# Altium PCB Board3_Layout.PcbDoc
Units mil, origin at the board's own origin, x right, y up, seen from the top; angles counter-clockwise.
Board outline 3200 x 3100 mil, 2 copper layers (Top Layer, Bottom Layer); 52 components, 45 nets, 229 pads, 51 vias.
Unrouted connection lines stored in the file: 1.
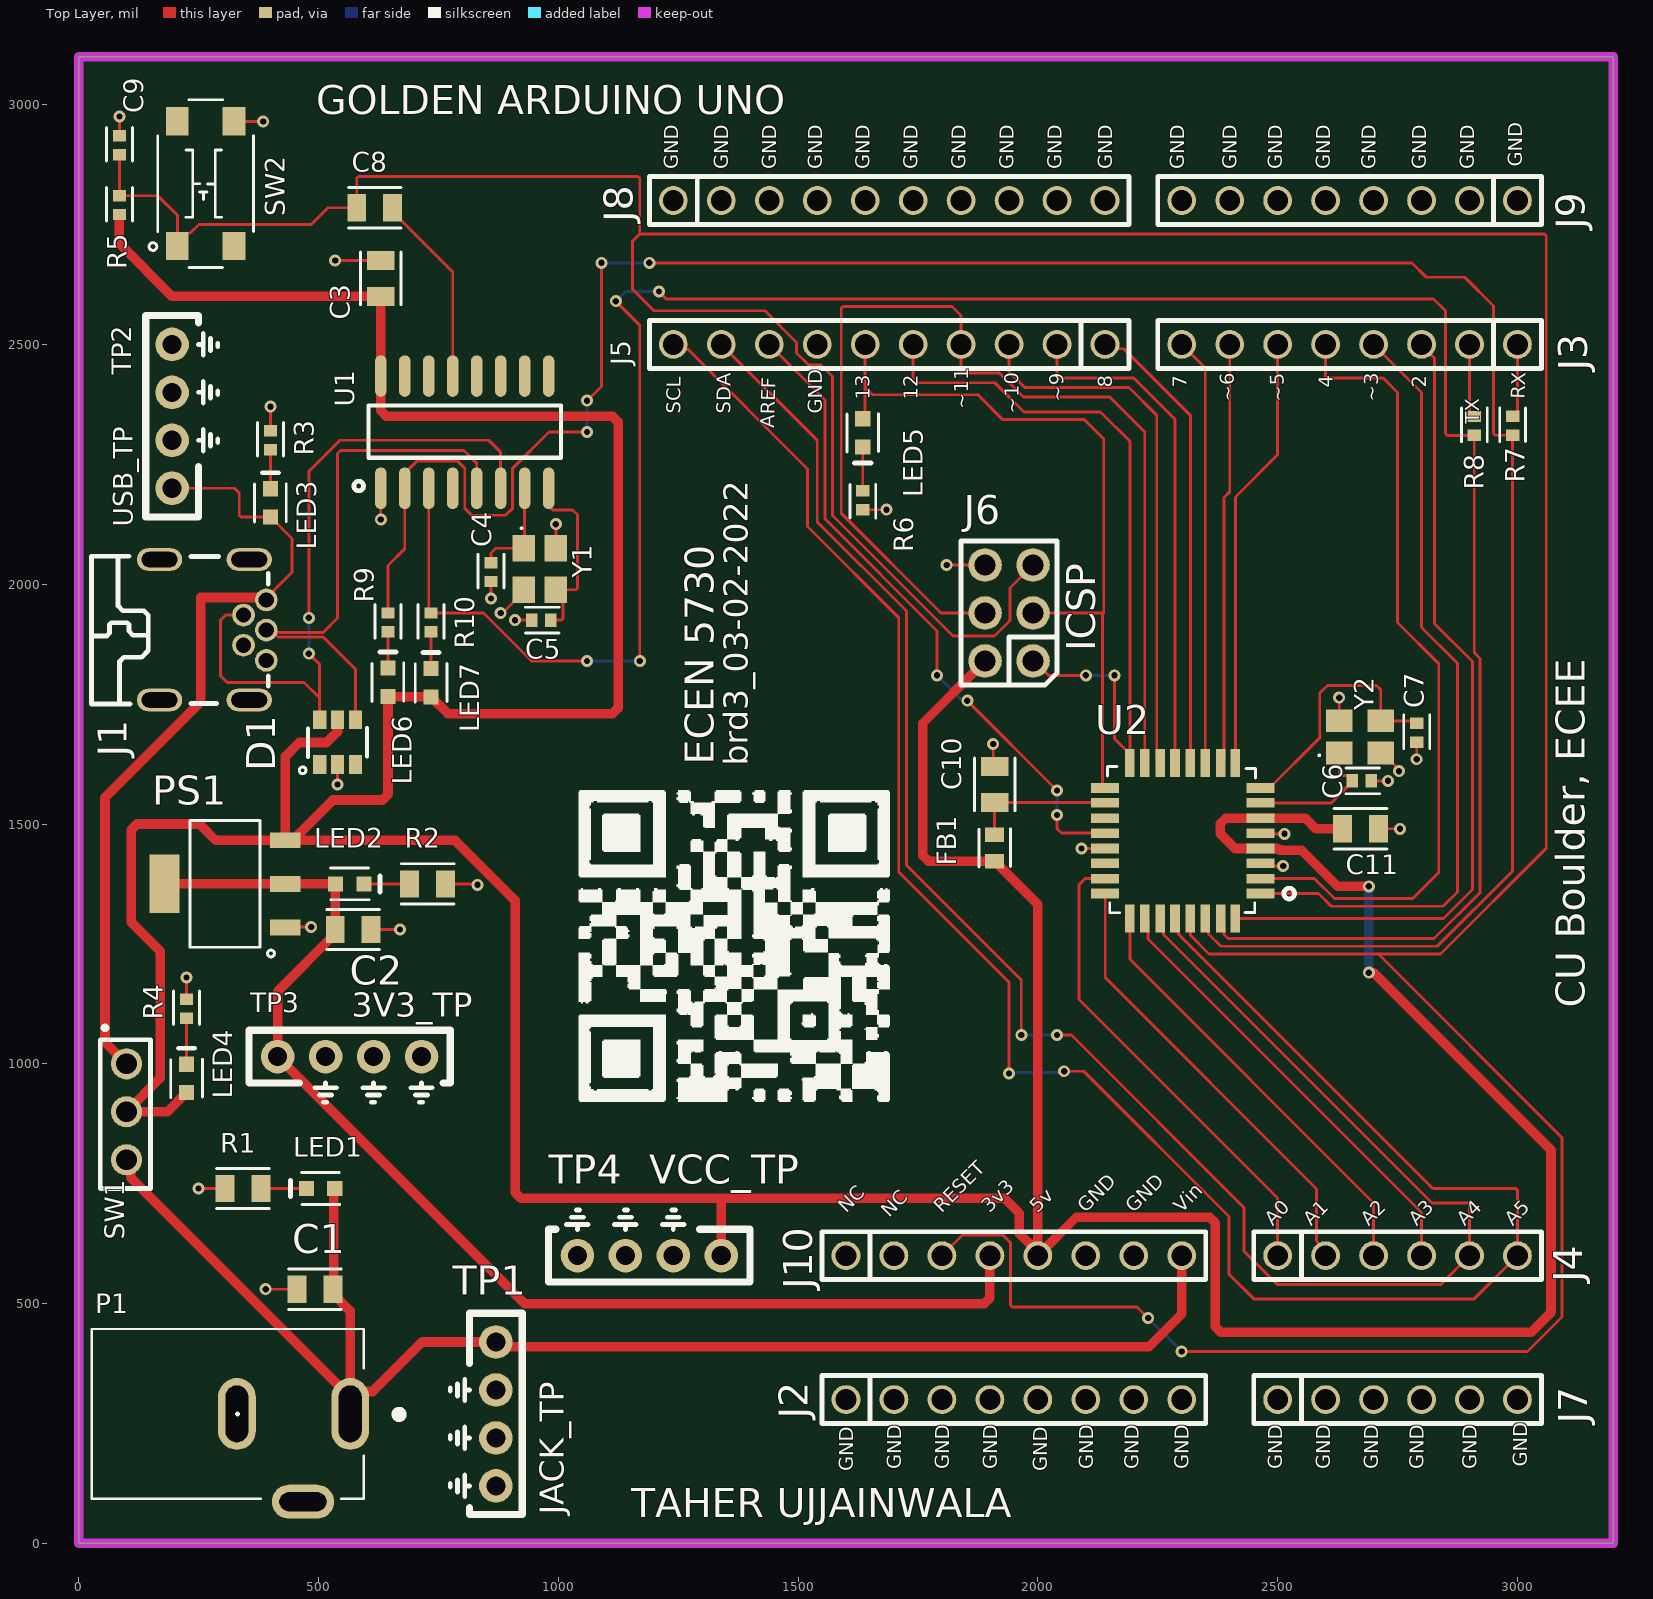
[diagram p0: Top Layer view]
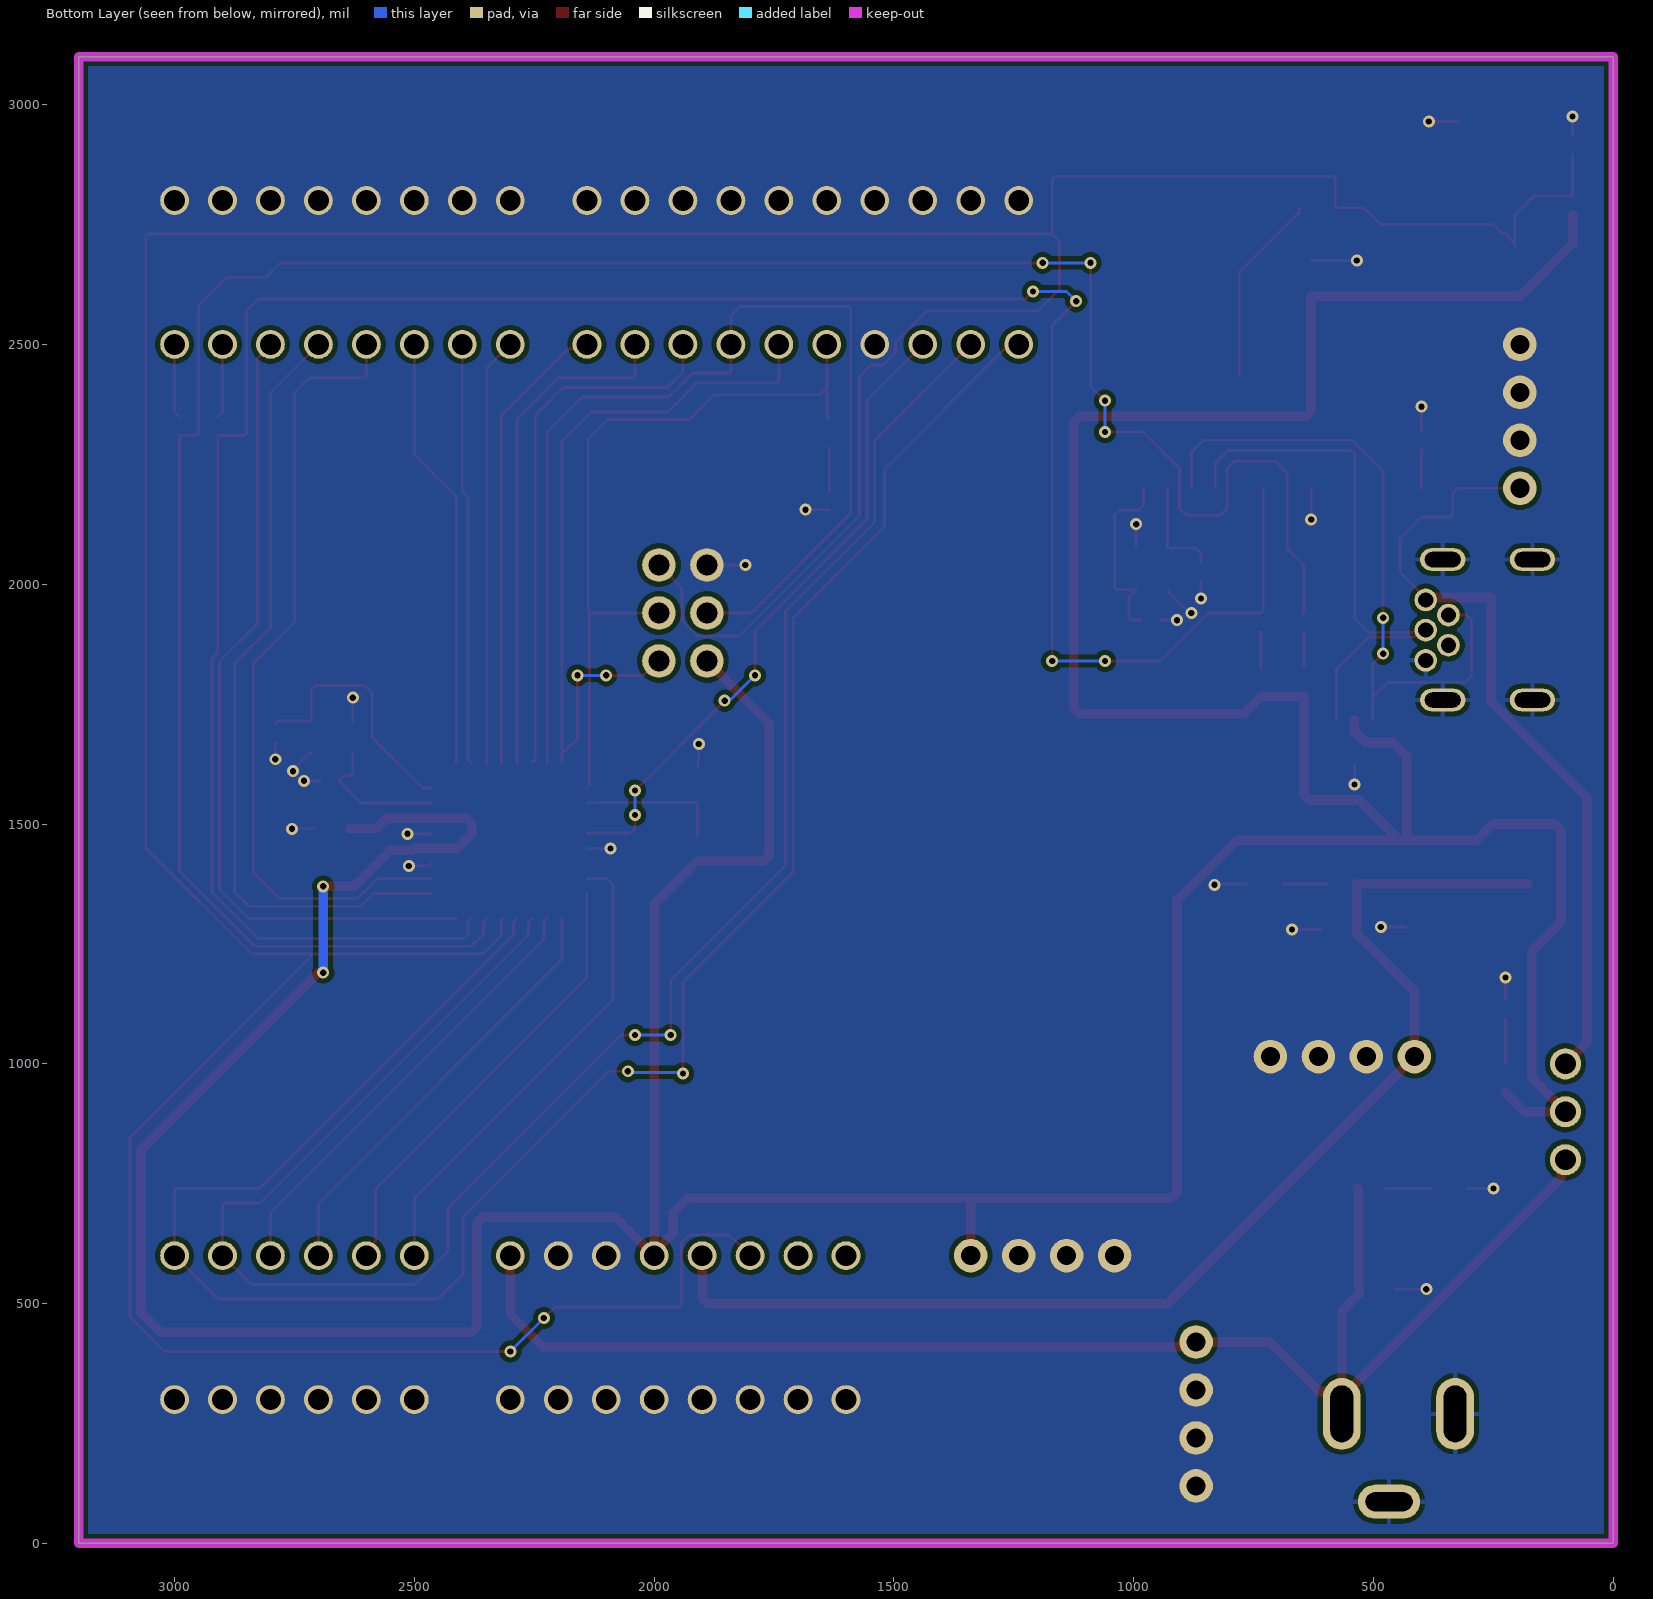
[diagram p1: Bottom Layer view, seen from below]
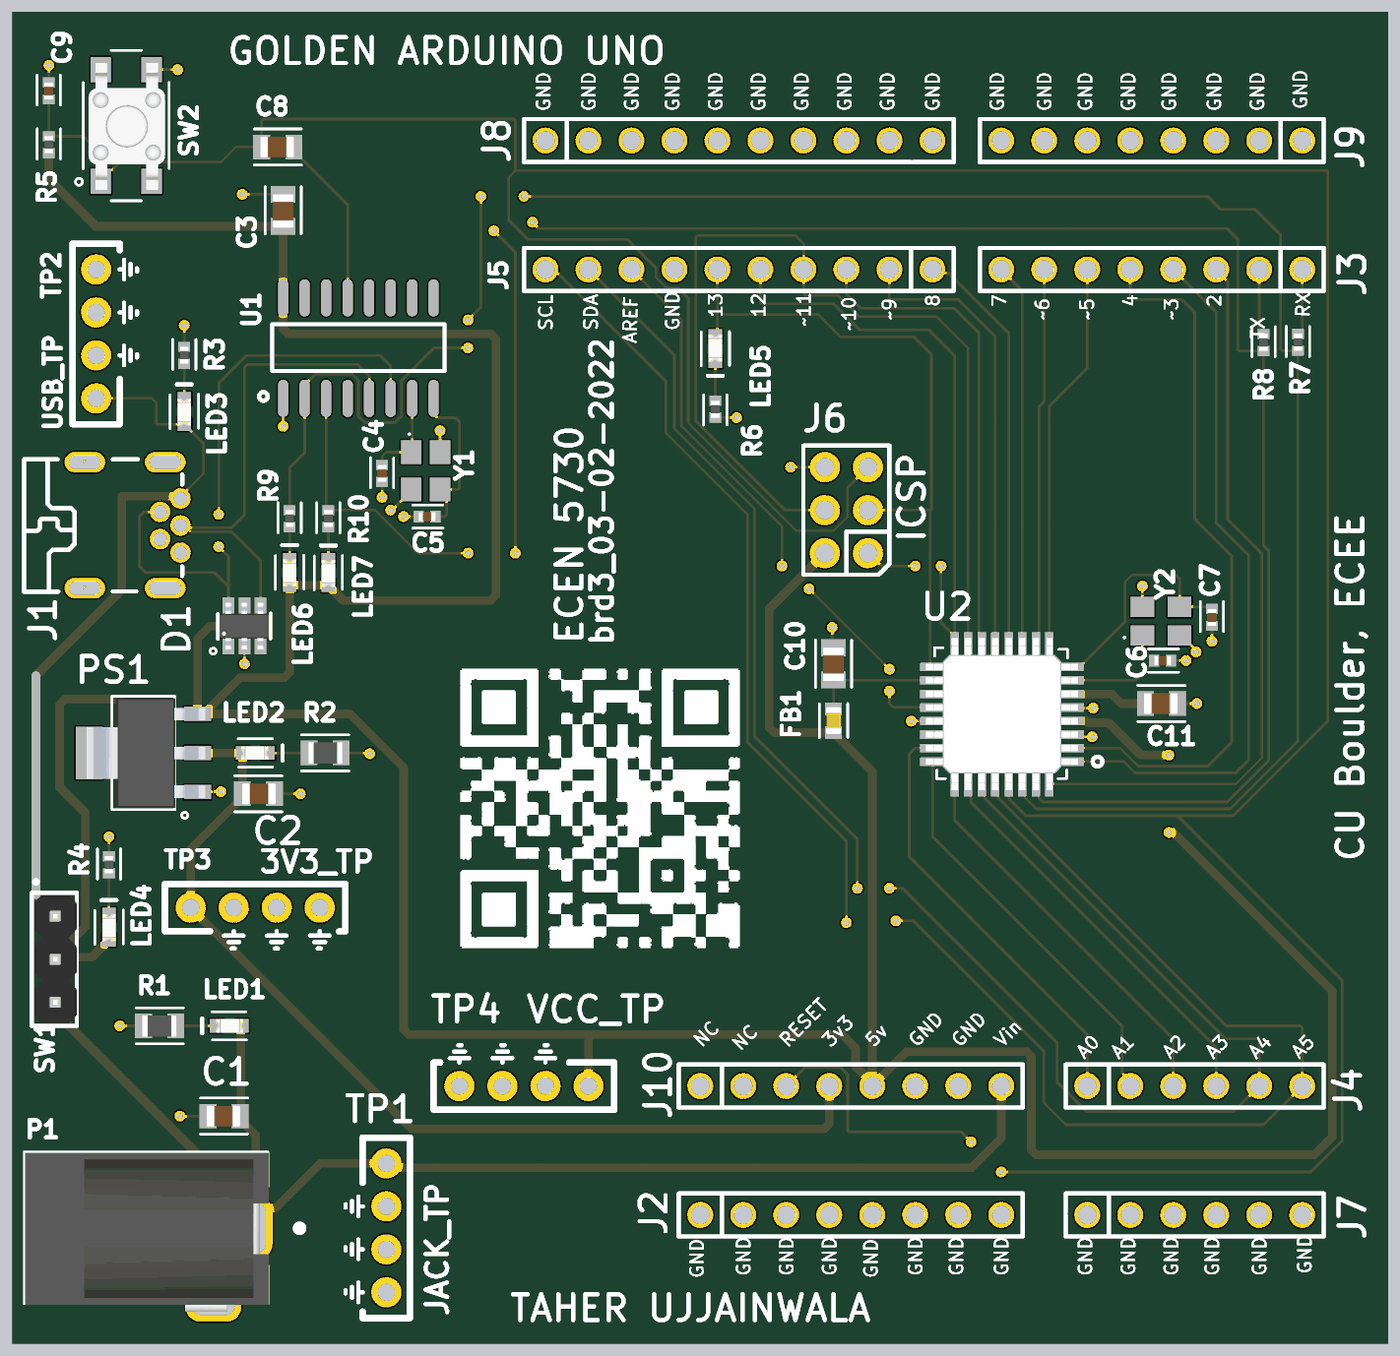
[diagram p2: 3D render of the assembled board from above, using the file's embedded part models]

## Layer stack, top to bottom
Top Solder: solder mask 0.4, Solder Resist, Dk 3.5
Top Layer: signal copper 1.4
Dielectric 1: dielectric 12.6, FR-4, Dk 4.8
Bottom Layer: signal copper 1.4
Bottom Solder: solder mask 0.4, Solder Resist, Dk 3.5

## Board outline
0,0 3200,0 3200,3100 0,3100

## Design rules (kind name [scope] priority, off if disabled: settings)
Clearance [All] p1: gap=10 ignorepadtopadclearanceinfootprint=FALSE except(0: Arc-Hole Track-Hole SMDPad-Hole THPad-Hole Via-Hole Fill-Hole Poly-Hole Region-Hole Text-Hole)
MinimumSolderMaskSliver [All] p1: minsoldermaskwidth=6
PlaneClearance [All] p1: clearance=10
PlaneConnect [All] p1: planeconnectstyle=Direct reliefexpansion=20 reliefentries=4 reliefconductorwidth=10 reliefairgap=10
PolygonConnect [All] p1: connectstyle=Direct reliefconductorwidth=10 reliefentries=4 polygonreliefangle="90 Angle" airgapwidth=10
RoutingVias [All] p1: holewidth=13 width=25 viastyle="Through Hole" minholewidth=13 minwidth=25 maxholewidth=60 maxwidth=80
SolderMaskExpansion [All] p1: expansion=4 istentingtop=FALSE
UnRoutedNet [All] p1: checkbadconnections=TRUE
Width "Schematic Width Constraint_2" [InNet('VCC_5V')] p1: maxlimit=20 minlimit=10 preferedwidth=20 minimp=50.000000 maximp=50.000000 favimp=50.000000
Width "Schematic Width Constraint_1" [InNet('JACK_5V')] p2: maxlimit=100 minlimit=10 preferedwidth=20 minimp=50.000000 maximp=50.000000 favimp=50.000000
Width "Schematic Width Constraint" [InNet('3V3')] p3: maxlimit=20 minlimit=10 preferedwidth=20 minimp=50.000000 maximp=50.000000 favimp=50.000000
Width [InNet('USB_5V')] p4: maxlimit=20 minlimit=10 preferedwidth=20 minimp=50.000000 maximp=50.000000 favimp=50.000000
26 further rules are at their usual default settings.

## Components (designator, comment, footprint, x,y, rotation, side; value= is the part's Value field where it differs from the comment)
C1 "22uF" 0805_Passive_Capaciitor 492.6,530 r0 top
C2 "22uF" 0805_Passive_Capaciitor 572.4,1280 r180 top
C3 "22uF" 0805_Passive_Capaciitor 630,2637.6 r90 top
C4 "22pF" 0402_Passive_Capacitor 860,2025.31 r90 top
C5 "22pF" 0402_Passive_Capacitor 964.68,1925 r0 top
C6 "22pF" 0402_Passive_Capacitor 2675.31,1590 r0 top
C7 "22pF" 0402_Passive_Capacitor 2790,1690.31 r90 top
C8 "22uF" 0805_Passive_Capaciitor 617.4,2785 r0 top
C9 "1uF" 0402_Passive_Capacitor 85,2915.31 r90 top
C10 "22uF" 0805_Passive_Capaciitor 1910,1582.6 r90 top
C11 "22uF" 0805_Passive_Capaciitor 2672.6,1490 r0 top
D1 "SRV05-4-P-T7" TVS 540,1670 r90 top value="TVS DIODE 5.5V 6TSOP"
FB1 "FB_10uH_0603" 0603_PASSIVE_Capacitor 1910,1450 r90 top
J1 "USB Mini" USB_MINI_B 280,1905 r270 top value="USB mini B"
J2 "PPTC081LFBN-RC" 8_PIN_ARDUINO_100MIL 1600,300 r0 top locked value=Female
J3 "PPTC081LFBN-RC" 8_PIN_ARDUINO_100MIL 3000,2500 r180 top locked value=Female
J4 "PPTC061LFBN-RC" 6_PIN_ARDUINO_100mil 2500,600 r0 top locked value=Female
J5 "PPTC101LFBN-RC" 10_PIN_ARDUINO_100MIL 2140,2500 r180 top locked value=Female
J6 "NRPN032PAEN-RC" ICSP 1990,1840 r180 top
J7 "PPTC061LFBN-RC" 6_PIN_ARDUINO_100mil 2500,300 r0 top locked value=Female
J8 "PPTC101LFBN-RC" 10_PIN_ARDUINO_100MIL 1240,2800 r0 top locked value=Female
J9 "PPTC081LFBN-RC" 8_PIN_ARDUINO_100MIL 3000,2800 r180 top locked value=Female
J10 "PPTC081LFBN-RC" 8_PIN_ARDUINO_100MIL 1600,600 r0 top locked value=Female
LED1 "KT-0603R" LED_0603 504.53,740 r180 top value=Red
LED2 "KT-0603R" LED_0603 565.47,1375 r0 top value=Green
LED3 "KT-0603R" LED_0603 400,2169.53 r90 top value=Red
LED4 "KT-0603R" LED_0603 225,969.53 r90 top value=Red
LED5 "KT-0603R" LED_0603 1635,2315.47 r270 top value=Red
LED6 "KT-0603R" LED_0603 645,1795.47 r90 top value=Red
LED7 "KT-0603R" LED_0603 735,1794.53 r90 top value=Red
P1 "Power Jack" Power_Jack 566.22,270 r180 top value="CONN PWR JACK 2X5.5MM SOLDER"
PS1 "AMS1117-3.3" LDO 305,1375 r90 top value="IC REG LINEAR 3.3V 800MA SOT223"
R1 "1k" 0805_Passive_Resistor 342.6,740 r180 top value="1K Ohm"
R2 "1k" 0805_Passive_Resistor 727.6,1375 r0 top value="1K Ohm"
R3 "1k" 0402_Passive_Resistor 400,2300.31 r90 top value="1K Ohm"
R4 "1k" 0402_Passive_Resistor 225,1114.68 r90 top value="1K Ohm"
R5 "10k" 0402_Passive_Resistor 85,2790.31 r90 top value=10KOhm
R6 "1k" 0402_Passive_Resistor 1635,2175 r270 top value="1K Ohm"
R7 "1k" 0402_Passive_Resistor 2990,2330.31 r90 top value="1K Ohm"
R8 "1k" 0402_Passive_Resistor 2910,2330 r90 top value="1K Ohm"
R9 "1k" 0402_Passive_Resistor 645,1920.31 r90 top value="1K Ohm"
R10 "1k" 0402_Passive_Resistor 735,1920.31 r90 top value="1K Ohm"
SW1 "PREC003SAAN-RC" 3_PIN_100mil 100,1000 r270 top value="CONN HEADER VERT 3POS 2.54MM"
SW2 "TL3305AF160QG" Switch_JLC 265,2835 r90 top
TP1 "TP_5V" TP10x_Probe 870,270 r270 top
TP2 "10x Probe TP" TP10x_Probe 195,2350 r90 top
TP3 "10x Probe TP" TP10x_Probe 565,1015 r0 top
TP4 "10x Probe TP" TP10x_Probe 1190,600 r180 top
U1 "CH340G" "USB to serial" 805,2317 r0 top value="USB to Serial"
U2 "ATMEGA328P-ANR" ATMega328P 2300,1465 r0 top value="IC MCU 8BIT 32KB FLASH 32TQFP"
Y1 "X322512MSB4SI" "Crystal resonator" 963.5,2031.7 r270 top value=12MHz
Y2 "X322516MLB4SI" "Crystal resonator" 2671.68,1683.5 r0 top value=16MHz

## Footprints (in the part's own frame and the unit in brackets; to place one, negate y for a bottom-side part, rotate by r counter-clockwise, add the part's x,y. Pads: shape width x height; smd on the part's side, far side on the other; paste and mask are expansions set on the pad)
3_PIN_100mil [mm]
  round 1.65 hole 1.1: 1(0,0) 2(2.54,0) 3(5.08,0)
  silkscreen extent -2,-1.4 6.6,1.27, body extent -1.14,-1.27 6.48,1.27, height 8.38
6_PIN_ARDUINO_100mil [mil]
  round 60 hole 43.31: 1(0,0) 2(100,0) 3(200,0) 4(300,0) 5(400,0) 6(500,0)
  silkscreen extent -50,-50 550,50
8_PIN_ARDUINO_100MIL [mil]
  round 60 hole 43.31: 1(0,0) 2(100,0) 3(200,0) 4(300,0) 5(400,0) 6(500,0) 7(600,0) 8(700,0)
  silkscreen extent -50,-50 750,50
10_PIN_ARDUINO_100MIL [mil]
  round 60 hole 43.31: 1(0,0) 2(100,0) 3(200,0) 4(300,0) 5(400,0) 6(500,0) 7(600,0) 8(700,0) 9(800,0) 10(900,0)
  silkscreen extent -50,-50 950,50
0402_Passive_Capacitor [mm] "Reference: https://www.worthingtonassembly.com/perfect-0402-footprint"
  rect 0.6x0.7 smd mask+0: 1(-0.5,0) 2(0.5,0)
  silkscreen extent -0.84,-0.69 0.94,0.69, body extent -0.5,-0.27 0.5,0.28, height 0.5
0402_Passive_Resistor [mm] "Reference: https://www.worthingtonassembly.com/perfect-0402-footprint"
  rect 0.6x0.7 smd mask+0: 1(-0.5,0) 2(0.5,0)
  silkscreen extent -0.84,-0.69 0.94,0.69, body extent -0.49,-0.25 0.51,0.25, height 0.4
0603_PASSIVE_Capacitor [mm] "Reference: http://livepartlibrary.com/fpdimensions.html"
  rect 0.75x1 smd mask+0: 1(-0.7,0) 2(0.7,0)
  silkscreen extent -1.02,-0.84 1.02,0.84, body extent -0.79,-0.45 0.81,0.45, height 0.79
0805_Passive_Capaciitor [mm] "Reference: http://livepartlibrary.com/fpdimensions.html"
  rect 1x1.45 smd mask+0: 1(-0.95,0) 2(0.95,0)
  silkscreen extent -1.4,-1.07 1.4,1.07, body extent -1.04,-0.62 0.96,0.63, height 1.4
0805_Passive_Resistor [mm] "Reference: http://livepartlibrary.com/fpdimensions.html"
  rect 1x1.45 smd mask+0: 1(-0.95,0) 2(0.95,0)
  silkscreen extent -1.4,-1.07 1.4,1.07, body extent -0.98,-0.62 1.02,0.63, height 0.5
ATMega328P [mil]
  rect 58x20 smd mask+1: 1(163.93,-110) 2(163.93,-79) 3(163.93,-47) 4(163.93,-16) 5(163.93,16) 6(163.93,47) 7(163.93,79) 8(163.93,110) 17(-160.07,110) 18(-160.07,79) 19(-160.07,47) 20(-160.07,16) 21(-160.07,-16) 22(-160.07,-47) 23(-160.07,-79) 24(-160.07,-110)
  rect 20x58 smd mask+1: 9(111.93,162) 10(80.93,162) 11(48.93,162) 12(17.93,162) 13(-14.07,162) 14(-45.07,162) 15(-77.07,162) 16(-108.07,162) 25(-108.07,-162) 26(-77.07,-162) 27(-45.07,-162) 28(-14.07,-162) 29(17.93,-162) 30(48.93,-162) 31(80.93,-162) 32(111.93,-162)
  silkscreen extent -155,-150 235,155, body extent -175,-177 179,177, height 46
"Crystal resonator" [mil]
  rect 55.11x47.24 smd: 1(-43.3,-35.43) 2(43.31,-35.43) 3(43.32,31.5) 4(-43.3,31.5)
  silkscreen extent -87,-42 -83,-38, body extent -65,-47 65,47, height 31
ICSP [mil]
  round 70 hole 43.31: 1(0,0) 2(0,-100) 3(0,-200) 4(100,0) 5(100,-100) 6(100,-200)
  silkscreen extent -50,-250 150,50
LDO [mil]
  rect 33x63 smd: 1(-91,-126) 2(0,-126) 3(91,-126)
  rect 122x63 smd: 4(0,126)
  silkscreen extent -152,-103 132,73, body extent -128,-144 128,132, height 73
LED_0603 [mm]
  rect 0.8x0.8 smd: 1(-0.75,0) 2(0.75,0)
  silkscreen extent -1.02,-0.84 1.6,0.84, body extent -0.84,-0.41 0.76,0.39, height 0.55
Power_Jack [mm]
  oval 2x3.8 hole 1.2 slot 3 at 90 deg: 1(0,0) 2(6,0)
  oval 3.3x1.8 hole 1 slot 2.5 at 0 deg: 3(2.5,4.65)
  silkscreen extent -2.79,-4.5 13.68,4.5, body extent -0.76,-4.45 13.64,4.95, height 11.49
Switch_JLC [mm]
  rect 1.5x1.2 smd: 1(-3.3,1.5) 2(3.3,1.5) 3(-3.3,-1.5) 4(3.3,-1.5)
  silkscreen extent -4.44,-2.54 4.45,3, body extent -3.8,-2.29 3.7,2.21, height 3.7
TP10x_Probe [mil] "Small Probs footprint"
  round 70 hole 40: 1(-150,0) 2(-50,0) 2(50,0) 2(150,0)
  silkscreen extent -210,-95 210,55
TVS [mm]
  rect 1x0.7 smd mask+0.025: 1(-1.162,0.95) 2(-1.162,0) 3(-1.162,-0.95) 4(1.2,-0.95) 5(1.2,0) 6(1.2,0.95)
  silkscreen extent -1.65,-1.55 0.76,2.03, body extent -1.37,-1.44 1.38,1.46, height 1.1
"USB to serial" [mil]
  oval 24x86.61 smd: 1(-175,-117) 2(-125,-117) 3(-75,-117) 4(-25,-117) 5(25,-117) 6(75,-117) 7(125,-117) 8(175,-117) 9(175,117) 10(125,117) 11(75,117) 12(25,117) 13(-25,117) 14(-75,117) 15(-125,117) 16(-175,117)
  silkscreen extent -231,-122 201,56
USB_MINI_B [mm]
  round 1.2 hole 0.8: 1(-1.58,2.826) 2(-0.78,1.622) 3(0.02,2.826) 4(0.82,1.622) 5(1.62,2.826)
  oval 1.2x2.4 hole 0.8 slot 1.9 at 90 deg: 6(-3.72,1.924) 7(3.72,1.924) 8(-3.72,-2.826) 9(3.72,-2.826)
  silkscreen extent -3.89,-6.42 3.93,2.93

## Part data
C1 C2 C3 C8 C10 C11: library part C_22uF_0805, "MULTILAYER CERAMIC CAPACITORS MLCC - SMD/SMT 22UF 25V 0805 ROHS", LCSC Part#=C45783, MFR Part #=CL21A226MAQNNNE, Datasheet=https://datasheet.lcsc.com/szlcsc/Samsung-Electro-Mechanics-CL21A226MAQNNNE_C45783.pdf, Type=Basic
C4 C5 C6 C7: library part C_22pF_0402, "MULTILAYER CERAMIC CAPACITORS MLCC - SMD/SMT 22PF 50V 0402 ROHS", LCSC Part#=C1555, MFR Part #=0402CG220J500NT, Datasheet=https://datasheet.lcsc.com/szlcsc/Guangdong-Fenghua-Advanced-Tech-0402CG220J500NT_C1555.pdf, Type=Basic
C9: library part C_1uF_0402, "MULTILAYER CERAMIC CAPACITORS MLCC - SMD/SMT 1UF 25V 0402 ROHS", LCSC Part#=C52923, MFR Part #=CL05A105KA5NQNC, Datasheet=https://datasheet.lcsc.com/szlcsc/Samsung-Electro-Mechanics-CL05A105KA5NQNC_C52923.pdf, Type=Basic
D1: library part D_TVS_Diode, "TVS SOT-23-6 ROHS", LCSC Part#=C85364, Datasheet=https://datasheet.lcsc.com/szlcsc/ProTek-Devices-SRV05-4-P-T7_C85364.pdf, MFR Part #=SRV05-4-P-T7, Type=Basic
FB1: "10 uH, 30 Q, 1.85 Ohm Series Resistance, 17MHz Self Resonant Frequency,Inductor , SMD 0603, 3 Amps rated current", LCSC Part#=C1035, MFR Part #=SDFL1608S100KTF, Datasheet=https://datasheet.lcsc.com/szlcsc/Sunlord-SDFL1608S100KTF_C1035.pdf, Type=Basic
J1: library part J_USB_B_Mini, "Through Hole USB Connectors RoHS", LCSC Part#=C46398, MFR Part #=920-462A2021D10102, Datasheet=https://datasheet.lcsc.com/szlcsc/2103081233_Jing-Extension-of-the-Electronic-Co-920-462A2021D10102_C46398.pdf, Type=Extended
J2 J3 J9 J10: library part JF_8_PIN_FEMALE_ARDUINO, "8 Position Header Connector 0.100\" (2.54mm) Through Hole Tin", LCSC Part#=C27438, Digikey Link=https://www.digikey.com/product-detail/en/PPTC081LFBN-RC/S7006-ND/810147/?itemSeq=304982354, Digikey Part=S7006-ND, Type=Extended
J4 J7: library part JF_6_PIN_FEMALE_ARDUINO, "6 Position Header Connector 0.100\" (2.54mm) Through Hole Tin", LCSC Part#=C40877, Digikey Link=https://www.digikey.com/product-detail/en/PPTC061LFBN-RC/S7004-ND/810145/?itemSeq=304982353, Digikey Part=S7004-ND, Type=Extended
J5 J8: library part JF_10_PIN_FEMALE_ARDUINO, "10 Position Header Connector 0.100\" (2.54mm) Through Hole Tin", LCSC Part#=C225507, Digikey Link=https://www.digikey.com/product-detail/en/PPTC101LFBN-RC/S7008-ND/810149/?itemSeq=304982352, Digikey Part=S7008-ND, Type=Extended
J6: library part J_ICSP, "Connector Header Through Hole 6 position 0.079\" (2.00mm)", LCSC Part#=C124384, Digikey Link=https://www.digikey.com/product-detail/en/NRPN032PAEN-RC/S5801-03-ND/804955/?itemSeq=304982355, Digikey Part=S5801-03-ND, Type=Extended
LED1 LED3 LED4 LED5 LED6 LED7: library part LED_RED_0603, "LIGHT EMITTING DIODES (LED) RED 520~625NM 90~100MCD@20MA TOP VIEW 0603 ROHS", LCSC Part#=C2286, Datasheet=https://datasheet.lcsc.com/szlcsc/Everlight-Elec-19-217-BHC-ZL1M2RY-3T_C72041.pdf, MFR Part #=KT-0603R, Type=Basic
LED2: library part LED_GREEN_0603, "LIGHT EMITTING DIODES (LED) GREEN 520~535NM 112~258MCD@20MA TOP VIEW 0603 ROHS", LCSC Part#=C72043, MFR Part #=19-217/GHC-YR1S2/3T, Type=Basic
P1: library part "P_Power Jack", "Power Barrel Connector Jack 2.10mm ID (0.083\"), 5.50mm OD (0.217\") Through Hole, Right Angle", LCSC Part#=C136744, Digikey Link=https://www.digikey.com/product-detail/en/PJ-102A/CP-102A-ND/275425/?itemSeq=304982367, Digikey Part=CP-102A-ND, Type=Extended
PS1: library part PS_AMS_LDO_3v3, "LOW DROPOUT REGULATORS(LDO) POSITIVE FIXED 1.3V @ 800MA 15V 3.3V 1A SOT-223 ROHS", LCSC Part#=C6186, MFR Part #=AMS1117-3.3, Type=Basic
R1 R2: library part R_1K_0805, "CHIP RESISTOR - SURFACE MOUNT 1KOHMS ±1% 1/8W 0805 ROHS", LCSC Part#=C17513, MFR Part #=0805W8F1001T5E, Type=Basic
R3 R4 R6 R7 R8 R9 R10: library part R_1K_0402, "1 kOhms chip resistor SURFACE MOUNT 1KOHMS ±1% 1/16W 0402 ROHS", LCSC Part#=C11702, MFR Part #=0402WGF1001TCE, Datasheet=https://datasheet.lcsc.com/szlcsc/Uniroyal-Elec-0402WGF1001TCE_C11702.pdf, Type=Basic
R5: library part R_10KOhm_0402, "CHIP RESISTOR - SURFACE MOUNT 10KOHMS ±1% 1/16W 0402 ROHS", LCSC Part#=C25744, MFR Part #=0402WGF1002TCE, Datasheet=https://datasheet.lcsc.com/szlcsc/Uniroyal-Elec-0402WGF1002TCE_C25744.pdf, Type=Basic
SW1: library part SW_3Pin_100mil_Switch, "Connector Header Through Hole 3 position 0.100\" (2.54mm)", LCSC Part#=C429954, Digikey Link=https://www.digikey.com/product-detail/en/PREC003SAAN-RC/S1012EC-03-ND/2774851/?itemSeq=304982371, Digikey Part=S1012EC-03-ND, Type=Extended
SW2: library part SW_Push_Button_JLC, "Tactile Switch SPST-NO Top Actuated Surface Mount", LCSC Part#=C174049, MFR Part #=C174049, Type=Extended
TP1 TP2 TP3 TP4: library part TP_10x_Probe, "Test Point 300 mil centers"
U1: library part U_USBtoSerial, "Transceiver USB 2.0 2Mbps SOP-16_150mil USB ICs RoHS", LCSC Part#=C14267, Datasheet=https://datasheet.lcsc.com/lcsc/2008191806_WCH-Jiangsu-Qin-Heng-CH340G_C14267.pdf, MFR Part #=CH340G, Type=Basic
U2: library part U_ATMega328P, "AVR AVR® ATmega Microcontroller IC 8-Bit 20MHz 32KB (16K x 16) FLASH 32-TQFP (7x7)", LCSC Part#=C14877, MFR Part #=ATMEGA328P-AU, Digikey Link=https://www.digikey.com/product-detail/en/ATMEGA328P-ANR/ATMEGA328P-ANRCT-ND/2774230/?itemSeq=304982365, Type=Basic
Y1: library part X_12MHz_Res, "SMD Crystal Resonators 12MHz ±10ppm SMD-3225_4P RoHS", LCSC Part#=C9002, Datasheet=https://datasheet.lcsc.com/szlcsc/Yangxing-Tech-X322512MSB4SI_C9002.pdf, MFR Part #=X322512MSB4SI, Type=Basic
Y2: library part X_16Mhz_Res, "±10ppm 16000000Hz -40℃~85℃ 贴片无源晶振 60Ω 9pF SMD3225-4P Crystals ROHS", LCSC Part#=C13738, MFR Part #=X322516MLB4SI, Type=Basic

## Via types
v1: diameter 25, hole 13, Top Layer to Bottom Layer, 51 vias

## Nets (pads, with @x,y where several pads share a name; then routed paths per layer and width w, separated by ;. In a path a pad name is that pad's centre, name@x,y a point inside that pad or via, vN(x,y) a via of type N, cw(c..) or ccw(c..) an arc to the next point about the centre after c; other vN are vias at no path point)
3V3: C2.2 J10.4 LED2.1 PS1.2 PS1.4 TP3.1 | length 2558.5
  Top Layer w20: PS1.4 PS1.2 LED2.1 535.47,1374.53 535.47,1280.47 C2.2 535,1271.14 415,1151.14 TP3.1 930,500 1888.28,500 1900,511.72 J10.4
A0: J4.1 U2.23 | length 1004
  Top Layer w6: U2.23 2098.63,1386 2086,1373.37 2086,1134 2500,720 J4.1
A1: J4.2 U2.24 | length 945.1
  Top Layer w6: U2.24@2140.42,1354.76 2140.42,1179.83 2581.24,739.01 2581.24,630.51 2600,611.76 J4.2
A2: J4.3 U2.25 | length 913.4
  Top Layer w6: U2.25 2191.93,1218.07 2700,710 J4.3
A3: J4.4 U2.26 | length 942
  Top Layer w6: U2.26 2229.93,1296 2229.93,1260.07 2800,690 J4.4
A4_SDA: J4.5 J5.9 U2.27 | length 3941.1
  Top Layer w6: J5.9 1540,2300 1540,2130 1726,1944 1726,1414 1965.5,1174.5 v1(1965.5,1060) ; v1(2040,1060) 2070,1060 2430,700 2430,609.19 2499.19,540 2840,540 J4.5 2900,706.49 2896.49,710 2821.54,710 2261.93,1269.62 2261.93,1296 U2.27
  Bottom Layer w6: v1(1965.5,1060) v1(2040,1060)
A5_SCL: J4.6 J5.10 U2.28 | length 4287.7
  Top Layer w6: J5.10 1250.33,2489.67 1270.33,2489.67 1520,2240 1520,2120 1710,1930 1710,1400 1940,1170 v1(1940,980) ; v1(2055,984.48) 2095.52,984.48 2398.69,681.31 2398.69,561.31 2450,510 2910,510 J4.6 3000,736.49 2996.49,740 2823.54,740 2292.93,1270.62 2292.93,1296 U2.28
  Bottom Layer w6: v1(1940,980) 1942.24,982.24 2052.76,982.24 v1(2055,984.48)
AREF: J5.8 U2.20 | length 1368
  Top Layer w6: J5.8 1556,2384 1556,2136.63 1790,1902.63 v1(1790,1810) ; v1(1852.98,1757.02) v1(2040,1570) ; v1(2040,1519) 2040,1490 2049,1481 U2.20
  Bottom Layer w6: v1(1790,1810) 1839.35,1760.65 1849.35,1760.65 v1(1852.98,1757.02) ; v1(2040,1519) v1(2040,1570)
CH340_RX: R8.1 R10.2 U1.3 U2.31 | length 5153.8
  Top Layer w6: U1.3 730,1945 R10.2 843.94,1940 943.94,1840 v1(1060,1840) ; v1(1120,2590) 1170,2540 v1(1170,1840) ; v1(1210,2610) 1210.07,2610 1225.24,2594.83 2825.17,2594.83 2850,2570 2850,2313.83 2853.51,2310.32 R8.1 2910,1857.31 2922,1845.31 2922,1356.75 2826.25,1261 2396.54,1261 2387.93,1269.62 2387.93,1296 U2.31
  Bottom Layer w6: v1(1060,1840) v1(1170,1840) ; v1(1120,2590) 1140,2610 v1(1210,2610)
CH340_TX: R7.1 R9.2 U1.2 U2.30 | length 5137.5
  Top Layer w6: R9.2@646.97,1940 R9.2 645,2038.82 680,2073.82 U1.2 680,2231.31 705,2256.31 790.36,2256.31 805,2241.66 805,2158.34 819.64,2143.69 890.36,2143.69 905,2158.34 905,2241.66 980.84,2317.5 v1(1060,2317.5) ; v1(1060,2382.5) 1090,2412.5 v1(1090,2670) ; v1(1190,2670) 2780,2670 2810,2640 2890,2640 2950,2580 2950,2314.14 2953.51,2310.63 R7.1 2990,1402.12 2832.88,1245 2381.54,1245 2355.93,1270.62 2355.93,1296 U2.30
  Bottom Layer w6: v1(1060,2317.5) v1(1060,2382.5) ; v1(1090,2670) v1(1190,2670)
D+: D1.4 J1.3 U1.5 | length 1170.9
  Top Layer w6: J1.3 395.97,1899.5 J1.3@405.89,1899.5 ; D1.4 577.4,1822.6 510,1890 415.39,1890 J1.3@405.89,1899.5 ; U1.5 830,2252.31 803.31,2279 546.63,2279 540,2272.37 540,1929.44 510.06,1899.5 J1.3@405.89,1899.5
D-: D1.6 J1.2 U1.6 | length 1433.6
  Top Layer w6: J1.2 306.71,1935.72 296,1925 296,1809 309.83,1795.17 469.83,1795.17 502.6,1762.4 ; v1(480,1855) 502.6,1832.4 502.6,1762.4 ; v1(480,1930) 480,2235 545,2300 855,2300 880,2275 U1.6 ; D1.6 502.6,1762.4
  Bottom Layer w6: v1(480,1855) v1(480,1930)
DIO2: J3.3 U2.32 | length 1699.6
  Top Layer w6: U2.32 2845.63,1303 2906,1363.37 2906,1838.69 2826.67,1918.02 2826.67,2471.51 2800,2498.18 J3.3
DIO3: J3.4 U2.1 | length 1648.5
  Top Layer w6: U2.1 2585.13,1355 2611.63,1328.5 2844.99,1328.5 2875,1358.51 2875,1835 2800,1910 2800,2400 J3.4
DIO4: J3.5 U2.2 | length 1678.8
  Top Layer w6: U2.2 2576.76,1386 2618.26,1344.5 2781.49,1344.5 2836,1399.01 2836,1834 2750,1920 2750,2400 2720,2430 2603.51,2430 2600,2433.51 J3.5
DIO5: J3.6 U2.9 | length 909.5
  Top Layer w6: U2.9 2411.93,2181.93 2500,2270 J3.6
DIO6: J3.7 U2.10 | length 880.9
  Top Layer w6: U2.10 2387.93,1634 2387.93,2180.56 2400,2192.63 J3.7
DIO7: J3.8 U2.11 | length 893.3
  Top Layer w6: J3.8 2348.93,2451.07 U2.11
DIO8: J5.1 U2.12 | length 964.3
  Top Layer w6: J5.1 2149,2491 2179,2491 2317.93,2352.07 U2.12
DIO9: J5.2 U2.13 | length 1066.5
  Top Layer w6: J5.2 2040,2433.51 2043.51,2430 2200,2430 2285.93,2344.07 U2.13
DIO10_SS: J5.3 U2.14 | length 1130.8
  Top Layer w6: J5.3 1940,2442.63 1972.63,2410 2190,2410 2247.93,2352.07 2247.93,1634 U2.14
DIO11_MOSI: J5.4 J6.5 U2.15 | length 2314.7
  Top Layer w6: J6.5 1797.88,1940 1590,2147.88 1590,2575.32 1593.51,2578.83 1821.17,2578.83 1840,2560 J5.4 1840,2443.51 1843.51,2440 1920,2440 1970,2390 2150,2390 2222.93,2317.07 U2.15
DIO12_MISO: J5.5 J6.1 U2.16 | length 1611.1
  Top Layer w6: J5.5 1740,2423.51 1743.51,2420 1910,2420 1970.96,2359.04 2130.96,2359.04 2191.93,2298.07 U2.16@2191.93,1646 ; J6.1 1992.23,1840 2022.23,1810 v1(2100,1810) ; v1(2160,1810) 2160,1677.93 U2.16@2191.93,1646 ; U2.16 U2.16@2191.93,1646
  Bottom Layer w6: v1(2100,1810) v1(2160,1810)
DIO13_SCK: J5.6 J6.2 LED5.1 U2.17 | length 1576.3
  Top Layer w6: LED5.1 1640,2350 1640,2410 ; J5.6 1640,2410 ; J6.2 2137.46,1940 2137.46,2302.54 2096.96,2343.04 1926.96,2343.04 1875,2395 1655,2395 1640,2410 ; 2134.5,1940 2134.5,1580.43 U2.17
DTR: C8.2 U1.13 | length 402.9
  Top Layer w6: C8.2 654.8,2776.14 780,2650.94 U1.13
GND: C1.1 C2.1 C3.2 C4.1 C5.1 C6.2 C7.1 C9.2 C10.2 C11.2 D1.2 J1.5 J1.6 J1.7 J1.8 J1.9 J2.1 J2.2 J2.3 J2.4 J2.5 J2.6 J2.7 J2.8 J5.7 J6.6 J7.1 J7.2 J7.3 J7.4 J7.5 J7.6 J8.1 J8.2 J8.3 J8.4 J8.5 J8.6 J8.7 J8.8 J8.9 J8.10 J9.1 J9.2 J9.3 J9.4 J9.5 J9.6 J9.7 J9.8 J10.6 J10.7 P1.2 P1.3 PS1.1 R1.2 R2.2 R3.2 R4.2 R6.2 SW2.4 TP1.2 TP2.2 TP3.2 TP4.2 U1.1 U2.3 U2.5 U2.21 Y1.2 Y1.4 Y2.2 Y2.4 | length 1451.1
  Top Layer w6: C9.2 v1(85,2975) ; R4.2 v1(225,1180) ; v1(250,740) R1.2 ; SW2.4 v1(384.92,2964.92) v1@385,2965 ; v1(390,530) C1.1 ; J1.5@391.25,1836.22 J1.5@391.87,1835.61 ; R3.2 v1(400,2370) v1@400,2375 ; PS1.1 432,1285 v1(485,1285) ; v1(535,2675) C3.2 ; v1(540,1582.5) D1.2 ; C2.1 v1(670,1280) ; v1(630,2135) U1.1 ; R2.2 829.74,1375 v1(831.5,1373.24) ; v1(860,1970) C4.1 ; v1@875,1945 v1(880,1940) 883.62,1940 928.07,1984.45 Y1.2 ; v1(910,1925) C5.1 ; Y1.4 v1(995,2125) ; R6.2 v1(1684.69,2155.31) ; v1(1810,2040) J6.6 ; v1(1906.97,1666.97) 1906.97,1636.69 C10.2 ; v1(2091,1449) U2.21 ; U2.3 2469.41,1412.52 v1(2511.52,1412.52) ; U2.5 2465.43,1479.5 v1(2514,1479.5) ; Y2.4 v1(2628.38,1763.38) ; C6.2 v1(2730,1590) ; C11.2 v1(2755,1490) ; Y2.2 2718.93,1648.07 2753.06,1613.93 v1(2753.06,1610) ; v1(2790,1635) C7.1
JACK_5V: C1.2 J10.8 LED1.1 P1.1 SW1.3 TP1.1 | length 3116.2
  Top Layer w15: C1.2@530,521.14 C1.2
  Top Layer w20: SW1.3 108.6,791.4 108.6,763.05 P1.1@566.22,305.43 ; C1.2@530,521.14 566.22,484.92 P1.1@566.22,305.43 ; C1.2 532.03,532.03 532.03,737.97 LED1.1 ; P1.1 P1.1@566.22,289.54 ; J10.8 2300,478.58 2231.42,410 906.72,410 906.28,410.43 879.57,410.43 TP1.1 716.22,420 612.89,316.67 593.35,316.67 P1.1@566.22,289.54 ; P1.1@566.22,289.54 P1.1@566.22,305.43
NC: J10.1 J10.2
NetC4_2: C4.2 U1.7 Y1.1 | length 218
  Top Layer w6: C4.2 860,2065 870,2075 Y1.1 930,2076.93 U1.7
NetC5_2: C5.2 U1.8 Y1.3 | length 396.9
  Top Layer w6: U1.8 980,2163.82 985,2158.82 985,2158.51 988.51,2155 1030,2155 1040,2145 1040,1991.89 1036.49,1988.38 Y1.3 1010,1973.38 1010,1928.51 1006.49,1925 C5.2
NetC6_1: C6.1 U2.7 Y2.1 | length 288.6
  Top Layer w6: U2.7 2611.6,1544 2655.63,1588.03 C6.1 2655.63,1591.97 2646.82,1600.78 2634.22,1600.78 2628.38,1606.62 Y2.1
NetC7_2: C7.2 U2.8 Y2.3 | length 539.9
  Top Layer w6: U2.8 2482.93,1575 2587.93,1680 2587.93,1685.89 2587.82,1686 2587.82,1772.82 2603.88,1788.88 2706.12,1788.88 2715,1780 Y2.3 2785,1715 C7.2
NetC10_1: C10.1 FB1.2 U2.18 | length 297.6
  Top Layer w6: FB1.2 C10.1 1935.54,1544.5 2039.83,1544.5 ccw(c2040,1570) 2040.24,1544.5 2113.93,1544.5 U2.18
NetJ3_1: J3.1 R7.2 | length 154.8
  Top Layer w6: R7.2 2991.19,2350 3000,2358.81 J3.1
NetJ3_2: J3.2 R8.2 | length 155.2
  Top Layer w6: J3.2 2900,2358.5 2908.81,2349.69 R8.2
NetLED1_2: LED1.2 R1.1 | length 95
  Top Layer w6: R1.1 LED1.2
NetLED2_2: LED2.2 R2.1 | length 95.2
  Top Layer w6: LED2.2 R2.1
NetLED3_2: LED3.2 R3.1 | length 81.6
  Top Layer w6: LED3.2 R3.1
NetLED4_2: LED4.2 R4.1 | length 95.9
  Top Layer w6: LED4.2 R4.1
NetLED5_2: LED5.2 R6.1 | length 91.3
  Top Layer w6: R6.1 LED5.2
NetLED6_2: LED6.2 R9.1 | length 75.6
  Top Layer w6: LED6.2 R9.1
NetLED7_2: LED7.2 R10.1 | length 76.6
  Top Layer w6: LED7.2 R10.1
RST: C8.1 C9.1 J6.3 J10.3 R5.2 SW2.1 U2.29 | length 9488.9
  Top Layer w6: C9.1 R5.2 165,2810 205.94,2769.06 SW2.1@205.94,2710.98 ; SW2.1 SW2.1@205.94,2710.98 ; J10.3 1843,643 1927,643 1943,627 1943,496.51 1946.51,493 2207,493 v1(2230,470) ; J6.3 1942,1992 1942,1924.12 1909.88,1892 1823.25,1892 1572,2143.25 1572,2433.11 1548.11,2457 1522.19,2457 1497,2482.19 1497,2503.81 1430.81,2570 1200,2570 1154.5,2615.5 1154.5,2714.5 1170,2730 ; v1(2300,400) 3020.81,400 3093,472.19 3093,846 2710,1229 ; U2.29 2317.93,1268.24 2357.17,1229 2710,1229 ; SW2.1@205.94,2710.98 226.57,2731.61 232.47,2731.61 250.87,2750 485,2750 520,2785 C8.1 580,2846.49 583.51,2850 1166.49,2850 1170,2846.49 1170,2730 ; 1170,2730 3056.49,2730 3060,2726.49 3060,1449.49 2839.51,1229 2710,1229
  Bottom Layer w6: v1(2230,470) v1(2300,400)
USB_5V: J1.1 LED3.1 SW1.1 TP2.1 | length 1683
  Top Layer w6: TP2.1 325,2200 335,2190 335,2143.51 338.51,2140 LED3.1 445,2095 445,2025 391.25,1971.25 J1.1 389.23,1969.23 J1.1@386.12,1972.34
  Top Layer w20: SW1.1 55,1045 55,1555 255,1755 255,1972.34 J1.1@386.12,1972.34
VCC_5V: C3.1 C11.1 D1.5 FB1.1 J6.4 J10.5 LED4.1 LED6.1 LED7.1 PS1.3 R5.1 SW1.2 TP4.1 U1.16 U2.4 U2.6 | length 11317.3
  Top Layer w20: R5.1 85,2710 194.8,2600.2 C3.1 U1.16 630,2361.72 641.72,2350 1113.28,2350 1125,2338.28 1125,1741.72 1113.28,1730 770,1730 LED7.1 734.53,1765.47 645.47,1765.47 LED6.1 645,1561.72 633.28,1550 530,1550 PS1.3@446,1466 ; LED4.1 185,900 SW1.2 170,970 170,1235 110,1295 110,1488.28 121.72,1500 251.86,1500 285.86,1466 PS1.3 ; D1.5 540,1692.9 517.1,1670 460,1670 431,1641 PS1.3 ; TP4.1 1340,720 ; J6.4 1760,1710 1760,1434.16 1771.72,1422.44 FB1.1 ; FB1.1@1919.69,1412.76 2000,1332.44 J10.5@2000,607.2 ; C11.1 2580,1490 2558,1512 U2.6 2391.72,1512 2380,1500.28 2380,1480 2411,1449 U2.4 2498.54,1449 2499.54,1448 2501.21,1448 2504.19,1445.02 2550.27,1445.02 2625.29,1370 v1(2690,1370) ; v1(2690,1190) 2700,1190 3070,820 3070,481.72 3028.28,440 2381.72,440 2370,451.72 2370,668.28 2358.28,680 2080,680 J10.5 J10.5@2000,607.2 ; PS1.3 PS1.3@446,1466 ; PS1.3@446,1466 784.7,1466 910,1340.7 910,731.72 921.72,720 1340,720 ; 1340,720 1930,720 1961.17,688.83 1961.17,646.03 J10.5@2000,607.2
  Bottom Layer w20: v1(2690,1190) v1(2690,1370)
pads on no net: D1.1 D1.3 J1.4 SW2.2 SW2.3 U1.4 U1.9 U1.10 U1.11 U1.12 U1.14 U1.15 U2.19 U2.22

## Polygon pours and split planes (outlines as drawn)
GND on Bottom Layer "GND_L02_P000" (solid, pour order 0): 0,3100 3200,3100 3200,0 0,0

## Keep-outs
Keep-Out Layer:
  lines w10: 0,0 0,3100 3200,3100 3200,0 0,0
  lines w20: 0,0 0,3100 3200,3100 3200,0 0,0

## Silkscreen, mask and mechanical layers (free items; w line width, h text height)
Top Overlay:
  drawing of 32 lines, arcs and shapes, not listed
  text "GOLDEN ARDUINO UNO" at 495,2980 h60
  text "USB_TP" at 113.34,2120 h40 r90
  text "ICSP" at 2120,1860 h60 r90
  text "ECEN 5730" at 1324,1624 h60 r90
  text "brd3_03-02-2022" at 1394.67,1621 h50 r90
  text "CU Boulder, ECEE" at 3140.01,1117 h60 r90
  text "3V3_TP" at 570,1098.33 h50
  text "VCC_TP" at 1190,750 h60
  text "JACK_TP" at 1011.67,60 h50 r90
  text "TAHER UJJAINWALA" at 1152,55 h60

## Text inside footprints (layer, text, board x,y; h text height)
J2: Top Overlay "GND" at 2020,150 h30 r90; Top Overlay "GND" at 1615,150 h30 r90; Top Overlay "GND" at 1715,155 h30 r90; Top Overlay "GND" at 1815,155 h30 r90; Top Overlay "GND" at 1915,155 h30 r90; Top Overlay "GND" at 2115,155 h30 r90; Top Overlay "GND" at 2210,155 h30 r90; Top Overlay "GND" at 2315,155 h30 r90
J3: Top Overlay "TX" at 2920,2335 h30 r90.34; Top Overlay "RX" at 3015.19,2385.18 h30 r87.9; Top Overlay "2" at 2810,2410 h30 r90.51; Top Overlay "~3" at 2710,2380 h30 r89.5; Top Overlay "4" at 2615,2410 h30 r90; Top Overlay "~5" at 2515,2380 h30 r91.69; Top Overlay "~6" at 2410,2380 h30 r90; Top Overlay "7" at 2310,2410 h30 r90
J4: Top Overlay "A1" at 2570,660 h30 r45; Top Overlay "A0" at 2490,660 h30 r45; Top Overlay "A2" at 2690,660 h30 r45; Top Overlay "A3" at 2790,660 h30 r45; Top Overlay "A4" at 2890,660 h30 r45; Top Overlay "A5" at 2990,660 h30 r45
J5: Top Overlay "GND" at 1250,2865 h30 r90; Top Overlay "GND" at 1355,2865 h30 r90; Top Overlay "GND" at 1455,2865 h30 r90; Top Overlay "GND" at 1550,2865 h30 r90; Top Overlay "GND" at 1650,2865 h30 r90; Top Overlay "GND" at 1750,2865 h30 r90; Top Overlay "GND" at 1850,2865 h30 r90; Top Overlay "GND" at 1950,2865 h30 r90; Top Overlay "GND" at 2050,2865 h30 r90; Top Overlay "GND" at 2155,2865 h30 r90
J7: Top Overlay "GND" at 3020,160 h30 r90; Top Overlay "GND" at 2915,155 h30 r90; Top Overlay "GND" at 2805,155 h30 r90; Top Overlay "GND" at 2710,155 h30 r90; Top Overlay "GND" at 2510,155 h30 r90; Top Overlay "GND" at 2610,155 h30 r90
J8: Top Overlay "8" at 2155,2410 h30 r89.52; Top Overlay "~9" at 2055,2380 h30 r91.29; Top Overlay "~10" at 1960,2355 h30 r90; Top Overlay "~11" at 1855,2365 h30 r90; Top Overlay "12" at 1750,2385 h30 r90; Top Overlay "13" at 1650,2385 h30 r90; Top Overlay "GND" at 1550,2355 h30 r90.2; Top Overlay "AREF" at 1450,2325 h30 r88.26; Top Overlay "SDA" at 1360,2355 h30 r90; Top Overlay "SCL" at 1255,2355 h30 r90
J9: Top Overlay "GND" at 3010,2870 h30 r90; Top Overlay "GND" at 2910,2865 h30 r90; Top Overlay "GND" at 2810,2865 h30 r90; Top Overlay "GND" at 2705,2865 h30 r90; Top Overlay "GND" at 2610,2865 h30 r90; Top Overlay "GND" at 2510,2865 h30 r90; Top Overlay "GND" at 2415,2865 h30 r90; Top Overlay "GND" at 2305,2865 h30 r90
J10: Top Overlay "NC" at 1600,687.07 h30 r45; Top Overlay "NC" at 1690,678.39 h30 r45; Top Overlay "RESET" at 1800,687.07 h30 r45; Top Overlay "3v3" at 1900,687.07 h30 r45; Top Overlay "5v" at 2000,687.07 h30 r45; Top Overlay "GND" at 2100,687.07 h30 r45; Top Overlay "GND" at 2200,687.07 h30 r45; Top Overlay "Vin" at 2300,687.07 h30 r45